# EAGLE board pmon_3v8_cover_top (EAGLE 6.5.0)

Size 66 x 66 mm. Coordinates in mm from the lower left corner, seen from the top.
Outline: 3,0 63,0 arc90 66,3 66,63 arc90 63,66 3,66 arc90 0,63 0,3 arc90 3,0
Outline: 47.96,4.56 47.96,12.39 50.91,12.39 50.91,4.56 47.96,4.56
Copper layers (1*16): Top 0.035mm / dielectric 1.5mm / Bottom 0.035mm
Design rules "default": minimum track width 10mil, minimum drill 24mil, track to track 8mil, track to pad 8mil, pad to pad 8mil, via to via 8mil, smd to smd 8mil, copper to edge 40mil, drill to drill 8mil, minimum pad ring 10mil, minimum via ring 8mil, stop-mask expansion 4mil, vias tented up to drill 0mil, thermal gap 10mil
Holes 3 mm at 7,7 59,7 59,59 7,59
Holes 4 mm at 7.3,20

## Footprints (pad centres in the part's own frame; a part is rotated, then mirrored left to right if it is on the bottom)
USB-MICRO-ZX62RD-AB-5P8 = smd 0.4 x 1.35: 1 1.3,5.425; 2 0.65,5.425; 3 0,5.425; 4 -0.65,5.425; 5 -1.3,5.425 | drill 1.016 pad 1.778 square: A -4.175,2.625; D 4.175,2.625 | drill 0.65 pad 0.914 square: B -2.225,5.75; C 2.225,5.75
1X03 = drill 1.016 square: 1 -2.54,0 | drill 1.016: 2 0,0; 3 2.54,0
TLE1105 = drill 1 pad 1.676: A -2.25,3.25; AX -2.25,-3.25; B 2.25,3.25; BX 2.25,-3.25

## Placement (x,y rotation side)
J1  USB  [USB-MICRO-ZX62RD-AB-5P8]  20.98,63.5 180 top
J2  USB  [USB-MICRO-ZX62RD-AB-5P8]  44.99,63.5 180 top
JP1  [1X03]  49.44,8.47 90 top
U$1  PUSH_BUTTON  [TLE1105]  7.3,20 0 top

## Library data of the parts
J1 J2 = pmon_3v8
JP1 U$1 = pmon_oled

## Text on the board
Bottom: NOTE: export the 'dimension' layer only / for laser cut and engraving.
Dimension: +5V | USB | POWERPLAY | 3.8V | DEVICE